# Altium PCB EMT- Exciting Source.PcbDoc
Units mil, origin at the board's own origin, x right, y up, seen from the top; angles counter-clockwise.
Board outline 800 x 1400 mil, 2 copper layers (Top Layer, Bottom Layer); 12 components, 12 nets, 40 pads, 2 vias.
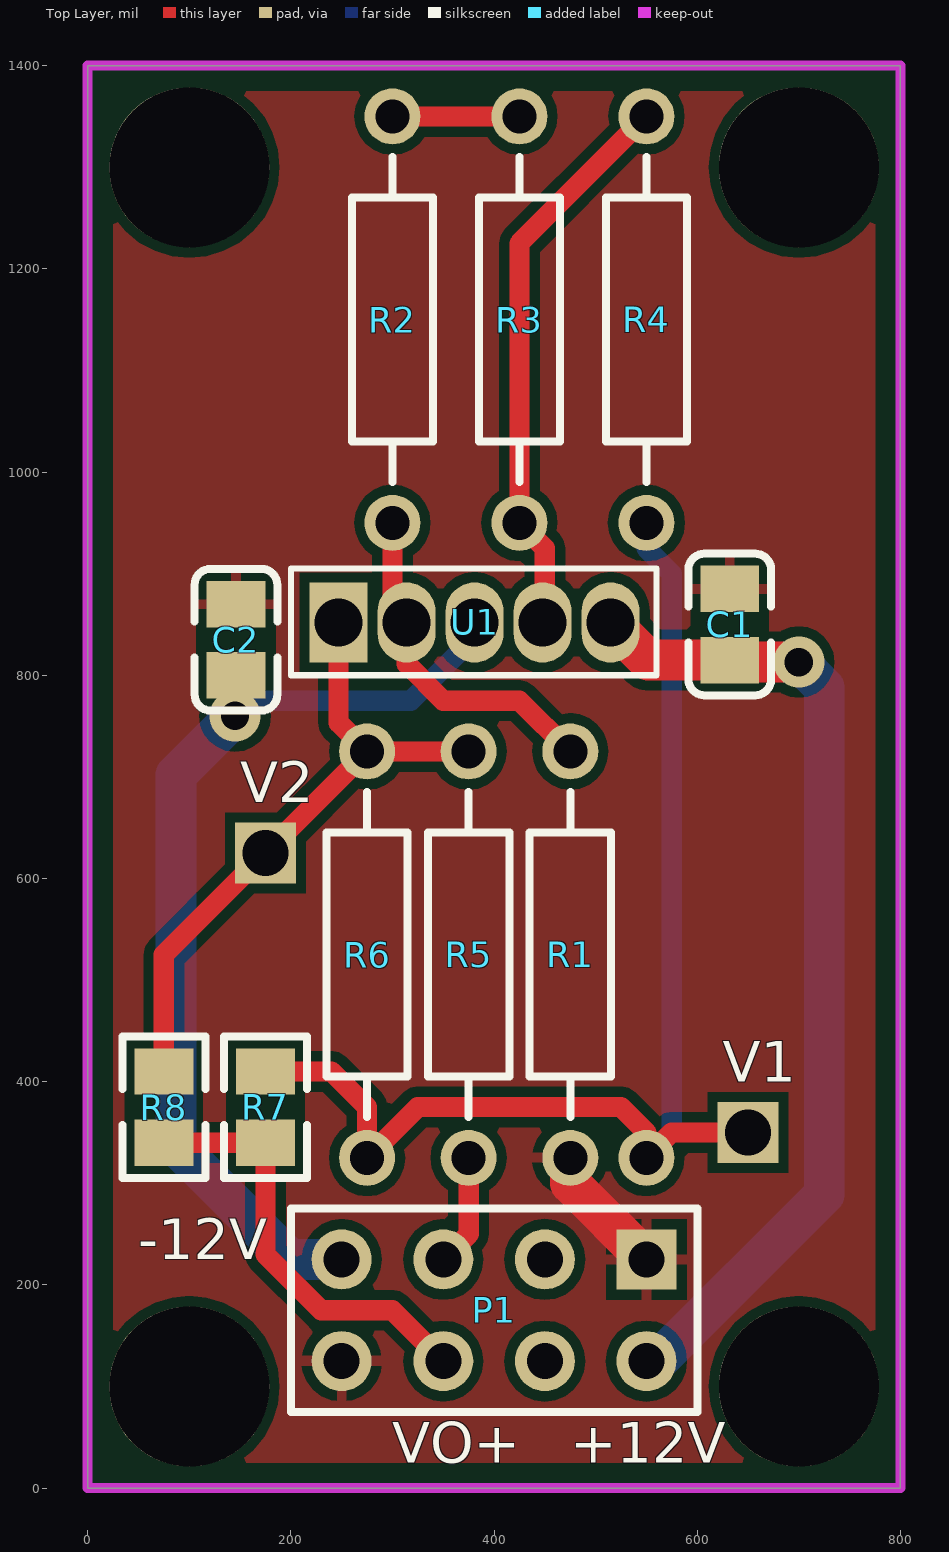
[diagram p0: Top Layer view]
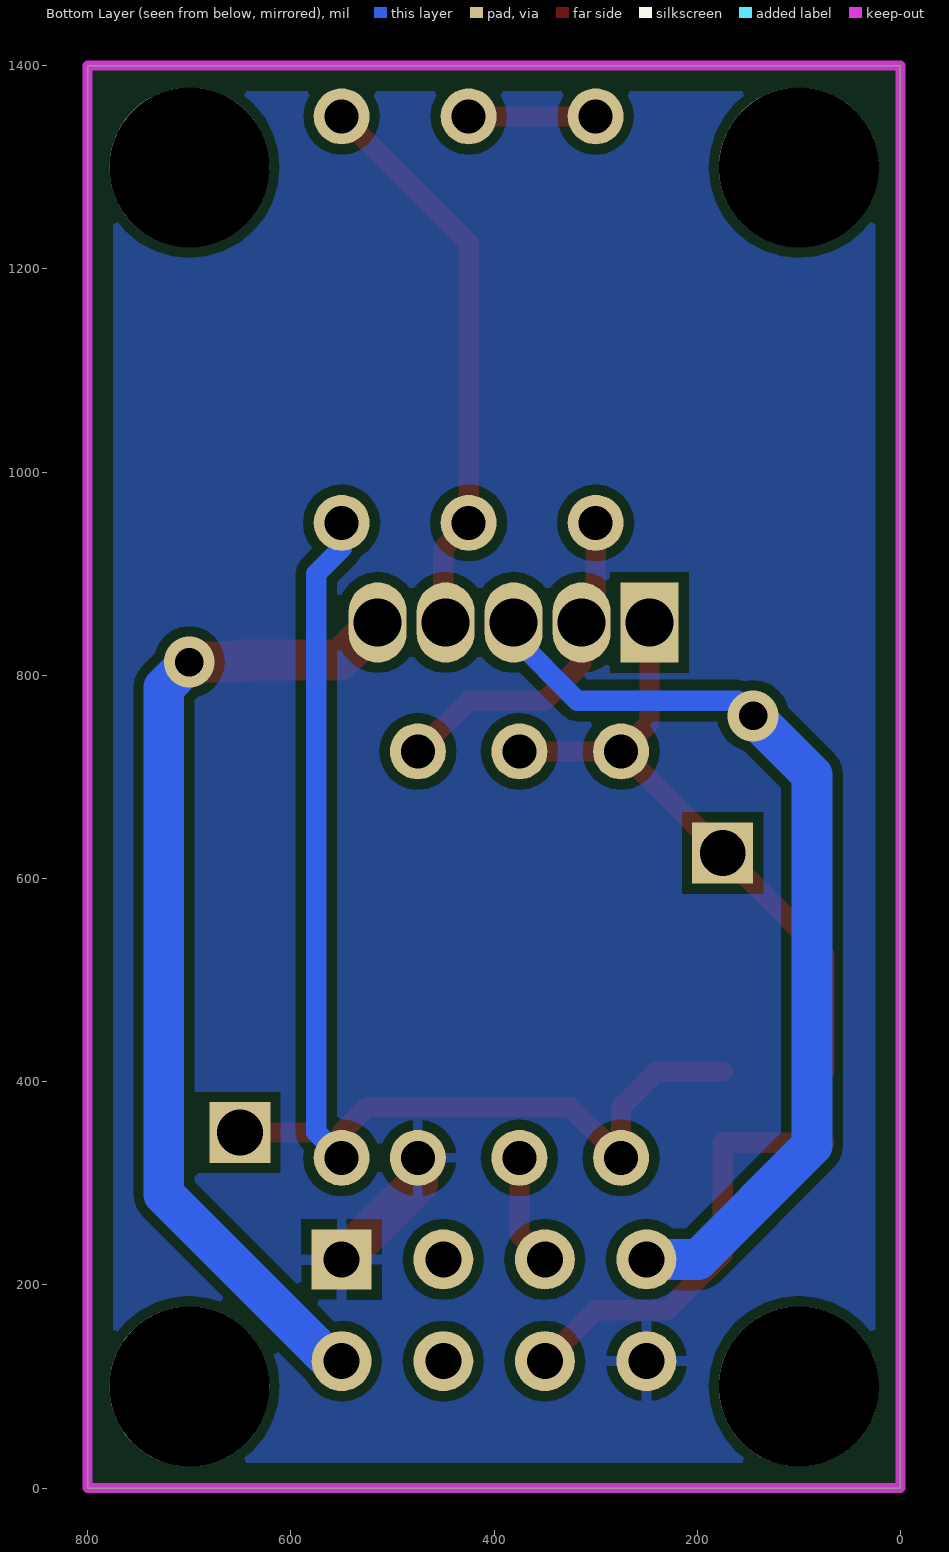
[diagram p1: Bottom Layer view, seen from below]

## Layer stack, top to bottom
Top Solder: solder mask 0.4, Solder Resist, Dk 3.5
Top Layer: signal copper 1.4
Dielectric 1: dielectric 12.6, FR-4, Dk 4.8
Bottom Layer: signal copper 1.4
Bottom Solder: solder mask 0.4, Solder Resist, Dk 3.5

## Board outline
0,0 0,1400 800,1400 800,0

## Design rules (kind name [scope] priority, off if disabled: settings)
Clearance [All] p1: gap=10
PolygonConnect [All] p1: connectstyle=Relief reliefconductorwidth=10 reliefentries=4 polygonreliefangle="90 Angle" airgapwidth=10
RoutingVias [All] p1: holewidth=28 width=50 viastyle="Through Hole" minholewidth=28 minwidth=50 maxholewidth=28 maxwidth=50
SolderMaskExpansion [All] p1: expansion=4
Width [All] p1: maxlimit=40 minlimit=20 preferedwidth=20
29 further rules are at their usual default settings.

## Components (designator, comment, footprint, x,y, rotation, side; value= is the part's Value field where it differs from the comment)
C1 "100nF(104) 10% 50V" LC-0805_C 632,850 r270 top
C2 "100nF(104) 10% 50V" LC-0805_C 146,835 r270 top
P1 "Header 4X2" HDR2X4 550,225 r180 top
R1 "Res2" AXIAL-0.4 475,525 r90 top
R2 "Res2" AXIAL-0.4 300,1150 r90 top
R3 "Res2" AXIAL-0.4 425,1150 r90 top
R4 "Res2" AXIAL-0.4 550,1150 r90 top
R5 "Res2" AXIAL-0.4 375,525 r90 top
R6 "Res2" AXIAL-0.4 275,525 r270 top
R7 "0Ω (0R0) ±1%" LC-0805_R 175,375 r270 top
R8 "0Ω (0R0) ±1%" LC-0805_R 75,375 r90 top
U1 "OPA544" TO-220-5 200,800 r0 top

## Footprints (in the part's own frame and the unit in brackets; to place one, negate y for a bottom-side part, rotate by r counter-clockwise, add the part's x,y. Pads: shape width x height; smd on the part's side, far side on the other; paste and mask are expansions set on the pad)
AXIAL-0.4 [mm] "Axial Device, Thru-Hole; 2 Leads; 0.4 in Pin Spacing"
  round 1.4 hole 0.85: 1(-5.08,0) 2(5.08,0)
  silkscreen extent -4.06,-1.02 4.06,1.02
HDR2X4 [mm] "Connector; Header; 4x2 Position"
  rect 1.5x1.5 hole 0.9: 1(0,0)
  round 1.5 hole 0.9: 2(0,2.54) 3(2.54,0) 4(2.54,2.54) 5(5.08,0) 6(5.08,2.54) 7(7.62,0) 8(7.62,2.54)
  silkscreen extent -1.27,-1.27 8.89,3.81
LC-0805_C [mm]
  rect 1.16x1.47 smd: 1(-0.89,0) 2(0.89,0)
  silkscreen extent -1.77,-1.04 1.77,1.04, body extent -1,-0.62 1,0.63, height 0.77
LC-0805_R [mm]
  rect 1.16x1.47 smd: 1(-0.89,0) 2(0.89,0)
  silkscreen extent -1.77,-1.04 1.77,1.03, body extent -1,-0.62 1,0.63, height 0.49
TO-220-5 [mm]
  rect 1.45x2 / inner round 1.2 / far side rect 1.45x2 hole 1.2: 1(1.192,1.319)
  oval 1.45x2 / inner round 1.778 / far side oval 1.45x2 hole 1.2: 2(2.892,1.319)
  oval 1.45x2 / inner round 1.2 / far side oval 1.45x2 hole 1.2: 3(4.592,1.319) 4(6.292,1.319) 5(7.992,1.319)
  silkscreen extent 0,0 9.14,2.67

## Part data
C1 C2: library part "0805 100nF(104) 10% 50V", "贴片电容"
P1: "Header, 4-Pin, Dual row"
R1 R2 R3 R4 R5 R6: "Resistor"
R7 R8: library part "0805 0Ω (0R0) 1%", "贴片电阻"
U1: "Imported"

## Free pads (board coordinates)
  round 157.48 hole 157.48: 0(100,100) 1(700,100) 2(700,1300) 3(100,1300)
  round 55.12 hole 33.46: 4(550,325)
  rect 60x60 hole 45: 5(175,625) 6(650,350)

## Via types
v1: diameter 50, hole 28, Top Layer to Bottom Layer, 2 vias

## Nets (pads, with @x,y where several pads share a name; then routed paths per layer and width w, separated by ;. In a path a pad name is that pad's centre, name@x,y a point inside that pad or via, vN(x,y) a via of type N, cw(c..) or ccw(c..) an arc to the next point about the centre after c; other vN are vias at no path point)
+12V: C1.2 P1.2 U1.5 | length 980
  Top Layer w40: U1.5 551.61,814.96 C1.2@650,814.96 ; C1.2@648,813 v1(700,813)
  Bottom Layer w40: P1.2 561,125 725,289 725,788 v1(700,813)
+VIN: P1.5 R5.1 | length 110.4
  Top Layer w20: P1.5 375,250 R5.1
-12V: C2.2 P1.7 U1.3 | length 938.6
  Bottom Layer w20: v1(145,760) 160,775 318,775 380.79,837.79 U1.3
  Bottom Layer w40: v1(145,760) 87,702 87,337 199,225 P1.7
-VIN: P1.3
AGND: C1.1 C2.1 P1.1 P1.8 R1.1 | length 131.1
  Top Layer w40: R1.1 475,300 P1.1
NetR1_2: R1.2 R2.1 U1.2 | length 321.8
  Top Layer w20: U1.2@300,840.79 R2.1 ; U1.2@313.86,826.93 313.86,811.14 350,775 425,775 R1.2
NetR2_2: R2.2 R3.2 | length 125
  Top Layer w20: R2.2 R3.2
NetR3_1: R3.1 R4.2 U1.4 | length 557.9
  Top Layer w20: U1.4@450,854.21 450,925 R3.1 425,1225 R4.2
NetR4_1: pad.4 pad.6 R4.1 R6.2 R7.1 | length 1251.6
  Top Layer w20: R7.1 239.96,410.04 275,375 R6.2 325,375 525,375 550,350 pad.4 575,350 pad.6
  Bottom Layer w20: pad.4 575,350 575,900 550,925 R4.1
NetR5_2: pad.5 R5.2 R6.1 R8.2 U1.1 | length 611.4
  Top Layer w20: R8.2 75,525 R6.1 ; U1.1@246.93,826.93 246.93,753.07 R6.1 ; R5.2 R6.1
VO+: P1.6 R7.2 R8.1 | length 428.5
  Top Layer w20: R8.1 R7.2 175,229.96 229.96,175 300,175 P1.6
VO-: P1.4

## Polygon pours and split planes (outlines as drawn)
AGND on Top Layer "Bottom Layer-No Net" (solid, remove dead copper, pour order 12): 25,1375 775,1375 775,25 25,25 25,1375
AGND on Bottom Layer "Bottom Layer-No Net" (solid, remove dead copper, pour order 14): 25,1375 775,1375 775,25 25,25 25,1375

## Keep-outs
Keep-Out Layer:
  the board outline again, w10

## Silkscreen, mask and mechanical layers (free items; w line width, h text height)
Top Overlay:
  text "V2" at 150,675 h40
  text "V1" at 625,400 h40
  text "-12V" at 50,225 h40
  text "VO+" at 300,25 h40
  text "+12V" at 475,25 h40